# Altium PCB PCB1.pcbdoc (part 2 of 2)
Units mil, origin at the board's own origin, x right, y up, seen from the top; angles counter-clockwise.
Board outline 5555 x 3675 mil, 2 copper layers (Top Layer, Bottom Layer); 152 components, 190 nets, 571 pads, 310 vias.
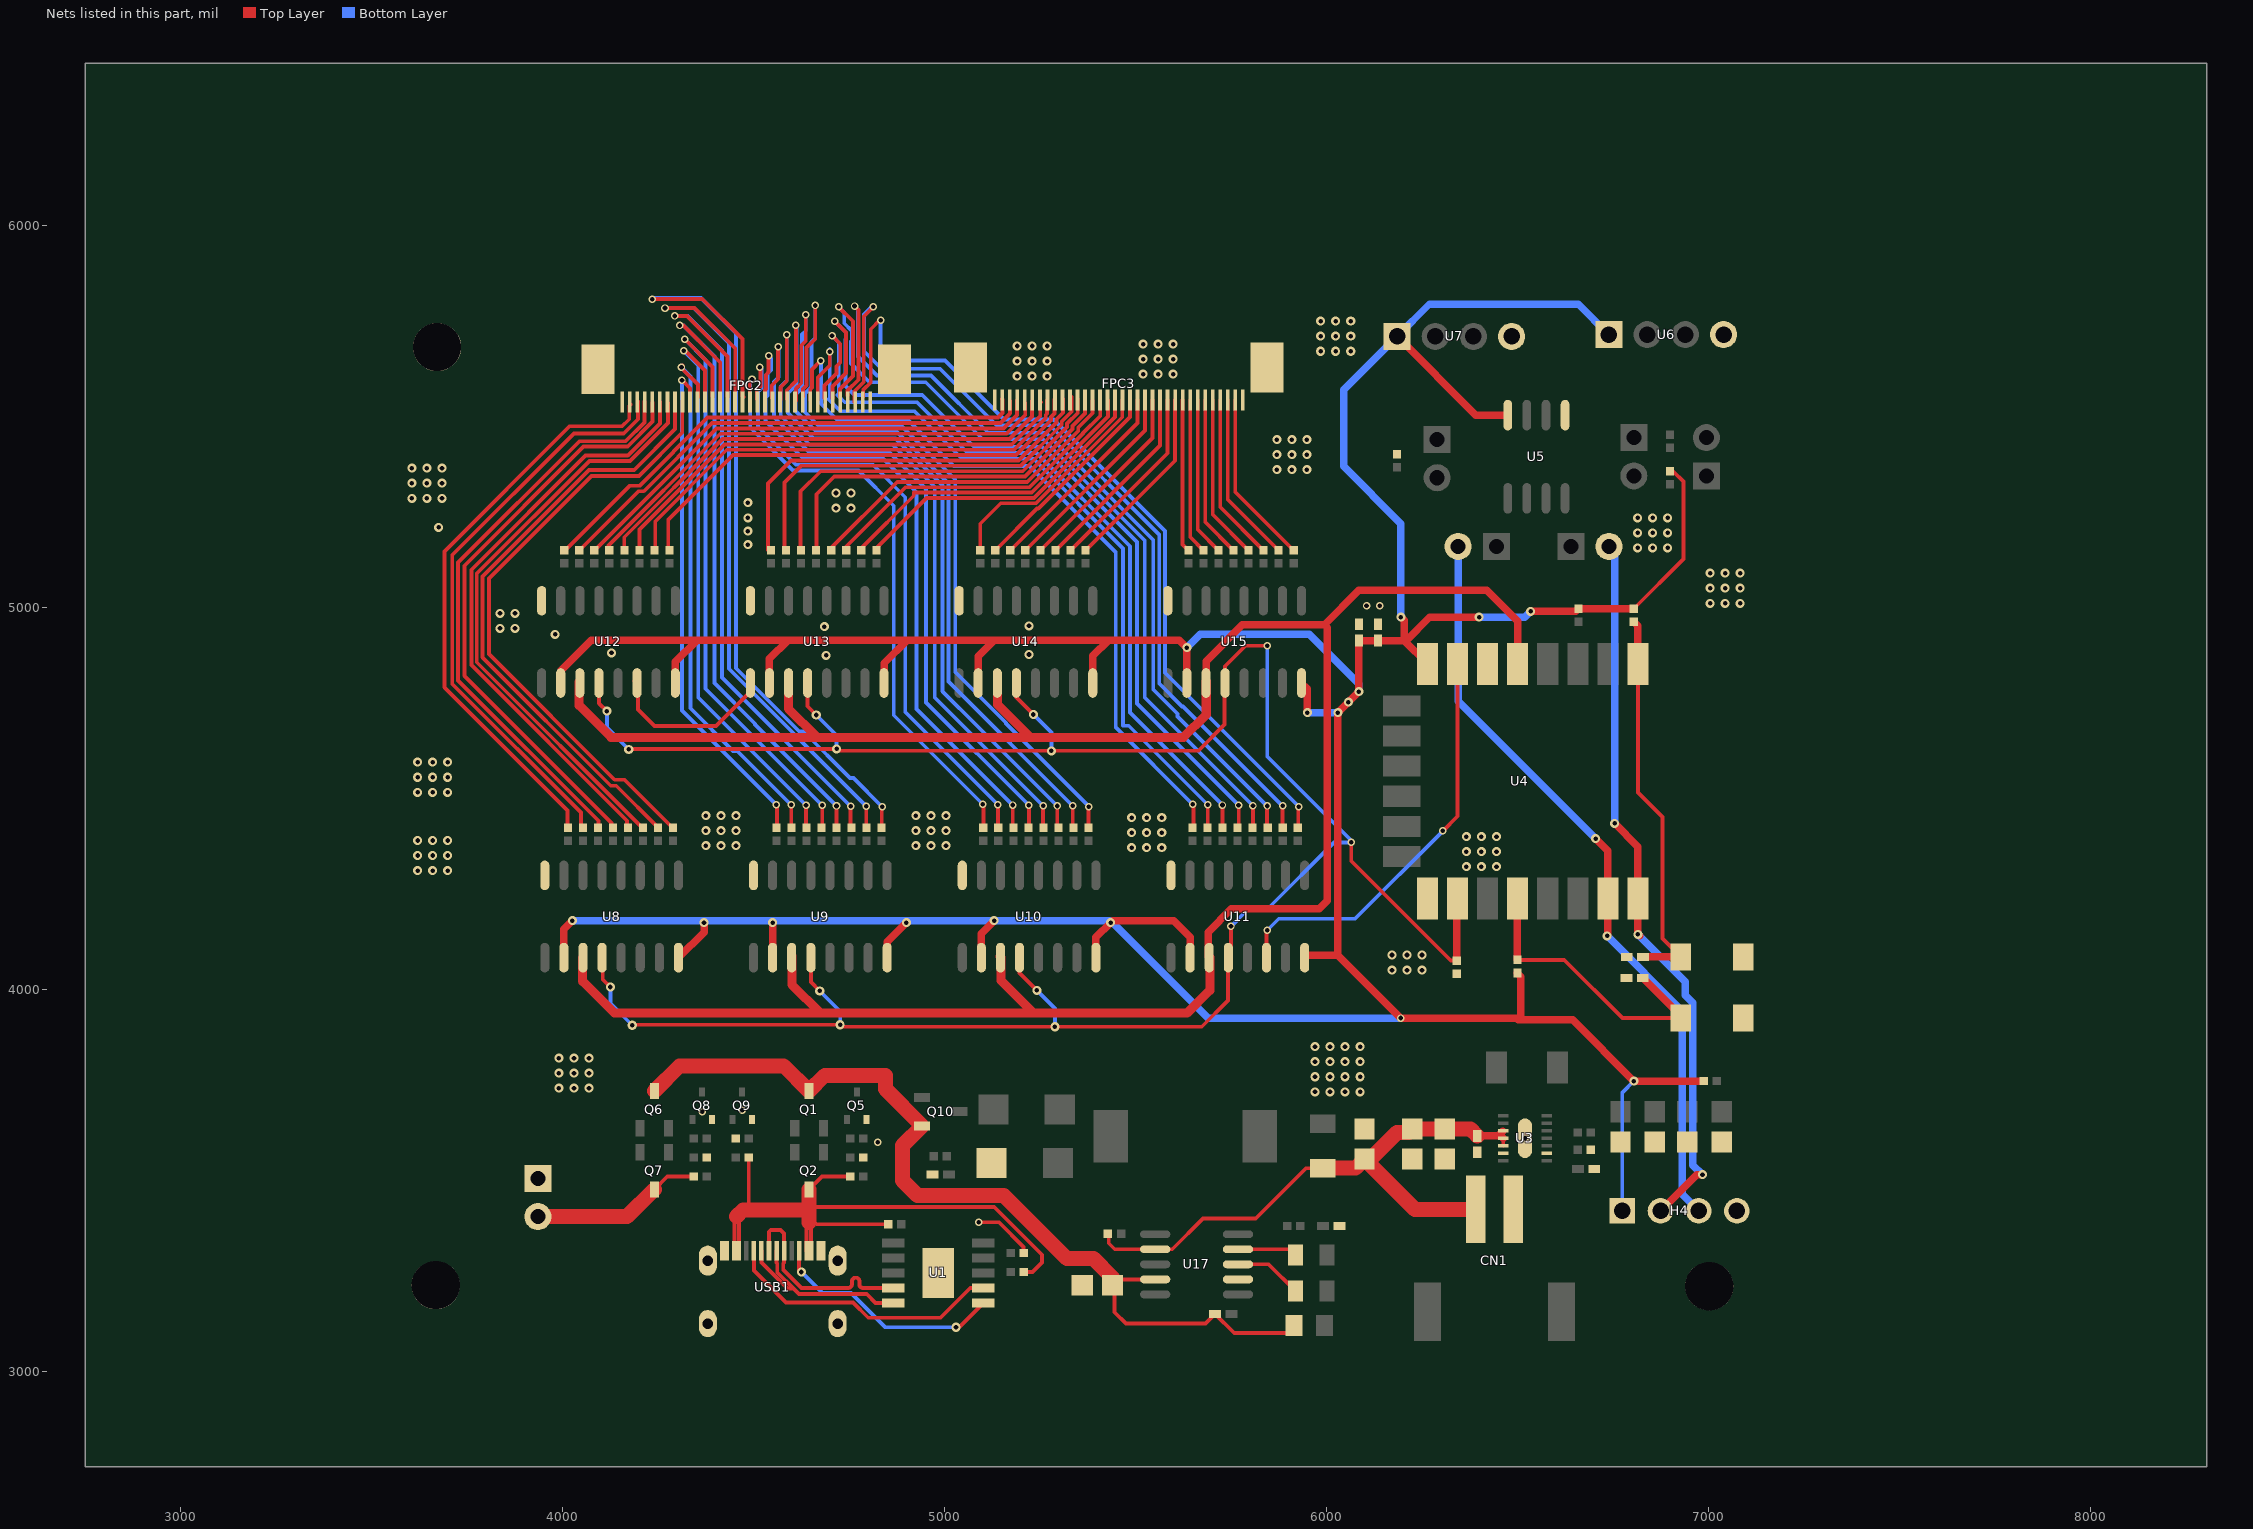
[diagram p2: the nets of this part, all layers, seen from the top]

## Via types
v1: diameter 23.62, hole 12.01, Top Layer to Bottom Layer, 204 vias
v2: diameter 19.68, hole 12.01, Top Layer to Bottom Layer, 69 vias
v3: diameter 24.02, hole 12.01, Top Layer to Bottom Layer, 37 vias

## Nets (pads, with @x,y where several pads share a name; then routed paths per layer and width w, separated by ;. In a path a pad name is that pad's centre, name@x,y a point inside that pad or via, vN(x,y) a via of type N, cw(c..) or ccw(c..) an arc to the next point about the centre after c; other vN are vias at no path point) (continued)
$5N19681: U12.14 U13.9 | length 417.6
  Top Layer w10: U12.14@4187.13,4807.76 U12.14@4188.82,4806.06 ; U12.14@4197.11,4800.53 4197.11,4733.25 4240.27,4690.09 4401.48,4690.09 U13.9@4490.34,4778.95
CC1: U1.7 USB1.A5 | length 735.6
  Top Layer w10: USB1.A5@4500.79,3315.08 4500.79,3264.21 4585,3180 4760,3180 4800,3140 4989.26,3140 5067.25,3217.99 U1.7@5101.78,3217.99
CC2: U1.6 USB1.B5 | length 620.8
  Top Layer w10: USB1.B5@4618.9,3315.08 4618.9,3266.1 v3(4625,3260) ; v3(5030,3115) 5038.15,3115 U1.6@5101.77,3178.62
  Bottom Layer w10: v3(4625,3260) 4680,3205 4755,3205 4845,3115 v3(5030,3115)
CHRG#: LED1.2 U17.3 | length 179.1
  Top Layer w10: U17.3@5768.53,3280 5848.65,3280 LED1.2@5918.65,3210
D+: U1.4 USB1.A6 USB1.B6 | length 535.9
  Top Layer w10: USB1.A6@4540.16,3315.08 4540.16,3365.16 4545,3370 4570,3370 4579.53,3360.47 USB1.B6@4579.53,3315.08 4579.53,3284.49 4577.69,3282.64 4577.69,3265.31 4625,3217.99 4747.42,3217.99 ccw(c4747.42,3227.84) 4757.27,3227.84 4757.27,3235.16 cw(c4767.11,3235.16) 4776.95,3235.16 4776.95,3227.84 ccw(c4786.79,3227.84) 4786.79,3217.99 U1.4@4865.55,3217.99
D-: U1.5 USB1.A7 USB1.B7 | length 536.6
  Top Layer w10: USB1.B7@4520.47,3315.08 4520.47,3284.49 4588.65,3216.31 4604.05,3216.31 ; USB1.A7@4559.84,3315.08 4559.84,3284.49 4561.69,3282.64 4561.69,3258.68 4604.05,3216.31 ; U1.5@4865.55,3178.62 4819.4,3178.62 4796.03,3201.99 4618.37,3201.99 4604.05,3216.31
DONE#: LED2.2 U17.4 | length 156.1
  Top Layer w10: U17.4@5768.53,3319.37 5904.28,3319.37 LED2.2@5918.65,3305
ESP_RXD: H2.2 H4.3 U4.21 | length 2002.7
  Top Layer w19.68: v1(6705,4395) 6737.15,4362.85 U4.21@6737.15,4238.15 6737.15,4142.15 v1(6735,4140)
  Bottom Layer w19.68: H2.2@6345,5160 6345,4755 v1(6705,4395) ; v1(6735,4140) 6931.69,3943.31 6931.69,3463.31 H4.3@6975,3420
ESP_TXD: H3.2 H4.2 U4.22 | length 1901.6
  Top Layer w19.68: v1(6755,4435) 6815.89,4374.11 U4.22@6815.89,4238.15 v1(6815.89,4144.11) v1@6820,4140 ; H4.2@6875,3420 6970,3515 v1(6985,3515)
  Bottom Layer w19.68: H3.2@6740,5160 6755,5145 v1(6755,4435) ; v1(6815.89,4144.11) 6940,4020 6940,3985 6960,3965 6960,3540 v1(6985,3515)
GND: C1.1 C2.2 C3.1 C4.1 C6.2 C7.1 C8.1 C9.1 C10.1 C11.1 C12.1 C13.1 C15.1 C16.1 C17.1 C18.2 CN1.1 D2.2 FPC2.1 FPC2.34 FPC2.35 FPC2.36 FPC3.1 FPC3.34 FPC3.35 FPC3.36 H4.4 H7.1 Q5.2 Q8.2 Q9.2 R1.1 R6.1 R9.1 R11.1 R21.1 R23.2 R31.2 SW1.2 SW2.2 TP1.1 TP2.1 TP4.1 U1.11 U3.2 U3.13 U3.15 U4.15 U5.5 U6.4 U7.4 U8.8 U9.8 U10.8 U11.8 U12.8 U13.8 U14.8 U15.8 U17.2 USB1.1 USB1.2 USB1.3 USB1.4 USB1.A1 USB1.A12 USB1.B1 USB1.B12 | length 154.3
  Top Layer w10: v2@5095,3390 5142.67,3390 5207.04,3325.63 R1.1@5207.04,3310
  other v1: 5970,3731.89 6009.37,3731.89 6048.74,3731.89 6088.11,3731.89 3990,3741.26 4029.37,3741.26 4068.74,3741.26 5970,3771.26 6009.37,3771.26 6048.74,3771.26 6088.11,3771.26 3990,3780.63 4029.37,3780.63 4068.74,3780.63 5970,3810.63 6009.37,3810.63 6048.74,3810.63 6088.11,3810.63 3990,3820 4029.37,3820 4068.74,3820 5970,3850 6009.37,3850 6048.74,3850 6088.11,3850 6171.65,4050.63 6211.02,4050.63 6250.39,4050.63 6171.65,4090 6211.02,4090 6250.39,4090 3620,4311.26 3659.37,4311.26 3698.74,4311.26 6366.65,4321.26 6406.02,4321.26 6445.39,4321.26 3620,4350.63 3659.37,4350.63 3698.74,4350.63 6366.65,4360.63 6406.02,4360.63 6445.39,4360.63 5490,4371.26 5529.37,4371.26 5568.74,4371.26 4375,4376.26 4414.37,4376.26 4453.74,4376.26 4925,4376.26 4964.37,4376.26 5003.74,4376.26 3620,4390 3659.37,4390 3698.74,4390 6366.65,4400 6406.02,4400 6445.39,4400 5490,4410.63 5529.37,4410.63 5568.74,4410.63 4375,4415.63 4414.37,4415.63 4453.74,4415.63 4925,4415.63 4964.37,4415.63 5003.74,4415.63 5490,4450 5529.37,4450 5568.74,4450 4375,4455 4414.37,4455 4453.74,4455 4925,4455 4964.37,4455 5003.74,4455 3620,4516.26 3659.37,4516.26 3698.74,4516.26 3620,4555.63 3659.37,4555.63 3698.74,4555.63 3620,4595 3659.37,4595 3698.74,4595 4690,4875 5221.02,4877.15 4127.69,4881.44 3980,4930 3835.63,4945.63 3875,4945.63 4685,4950 5221.02,4952.15 3835.63,4985 3875,4985 7005,5011.26 7044.37,5011.26 7083.74,5011.26 7005,5050.63 7044.37,5050.63 7083.74,5050.63 7005,5090 7044.37,5090 7083.74,5090 6815,5156.26 6854.37,5156.26 6893.74,5156.26 4485,5165 6815,5195.63 6854.37,5195.63 6893.74,5195.63 4485,5200 3675,5210 4485,5235 6815,5235 6854.37,5235 6893.74,5235 4715.63,5260.63 4755,5260.63 4485,5275 3605,5286.26 3644.37,5286.26 3683.74,5286.26 4715.63,5300 4755,5300 3605,5325.63 3644.37,5325.63 3683.74,5325.63 5870,5361.26 5909.37,5361.26 5948.74,5361.26 3605,5365 3644.37,5365 3683.74,5365 5870,5400.63 5909.37,5400.63 5948.74,5400.63 5870,5440 5909.37,5440 5948.74,5440 5190,5606.26 5229.37,5606.26 5268.74,5606.26 5520,5611.26 5559.37,5611.26 5598.74,5611.26 5190,5645.63 5229.37,5645.63 5268.74,5645.63 5520,5650.63 5559.37,5650.63 5598.74,5650.63 5985,5671.26 6024.37,5671.26 6063.74,5671.26 5190,5685 5229.37,5685 5268.74,5685 5520,5690 5559.37,5690 5598.74,5690 5985,5710.63 6024.37,5710.63 6063.74,5710.63 5985,5750 6024.37,5750 6063.74,5750
  other v2: 5090,3390 4825,3600 4365,3680 4470,3683.33 6105,5005 6140,5005
  other v3: 6520,3610
GPIO0: C2.1 R24.1 SW2.1 U4.18 | length 798.8
  Top Layer w10: R24.1@6500,4077.04 6622.96,4077.04 6775,3925 SW2.1@6928.11,3925
  Top Layer w19.68: R24.1@6500,4077.04 6500,4237.23 U4.18@6500.92,4238.15 ; C2.1@6828.54,4030 6928.11,3930.43 SW2.1@6928.11,3925
HSPI_CLK: U4.5 U8.11 U9.11 U10.11 U11.11 U12.11 U13.11 U14.11 U15.11 | length 6663
  Top Layer w19.68: U15.11@5684.72,4802.46 5685,4802.74 5685,4860 5780,4955 5995,4955 ; U11.11@5692.99,4083.15 5690,4086.14 5690,4150 5750.69,4210.69 5980.69,4210.69 6002.35,4232.35 6002.35,4947.65 5995,4955 ; U4.5@6500.93,4852.32 6500.93,4964.07 6420,5045 6085,5045 5995,4955
  Top Layer w23.62: U12.11@4042.7,4804.94 4042.7,4744.01 4126.48,4660.23 4665.97,4660.23 ; U8.11@4051.96,4082.31 4051.96,4021.38 4135.74,3937.6 4675.23,3937.6 ; U13.11@4591.08,4810.02 4591.08,4735.12 4665.97,4660.23 ; U9.11@4600.34,4087.39 4600.34,4012.49 4675.23,3937.6 ; U14.11@5138.19,4806.21 5138.19,4746.55 5224.51,4660.23 ; U10.11@5144.91,4086.12 5147.45,4083.58 5147.45,4023.92 5233.77,3937.6 ; U15.11@5685.3,4806.21 5685.3,4719.89 5625.63,4660.23 5224.51,4660.23 ; U11.11@5694.56,4083.58 5694.56,3997.26 5634.9,3937.6 5233.77,3937.6 ; 4665.97,4660.23 5224.51,4660.23 ; 4675.23,3937.6 5233.77,3937.6
HSPI_CS: R23.1 U4.16 U8.12 U9.12 U10.12 U11.12 U12.12 U13.12 U14.12 U15.12 | length 6543.2
  Top Layer w10: U12.12@4095.27,4806.32 4095.27,4749.19 v3(4115.58,4728.88) ; U8.12@4104.53,4083.68 4104.53,4026.56 v3(4124.84,4006.25) ; v3(4172.7,4628.6) 4173.97,4629.87 v3(4717.27,4629.87) 4722.35,4624.79 v3(5279.62,4624.79) 5664.25,4624.79 5732.79,4693.34 U15.12@5732.79,4803.78 ; v3(4181.96,3905.97) 4183.23,3907.24 v3(4726.54,3907.24) 4731.61,3902.16 v3(5288.88,3902.16) 5673.51,3902.16 5742.05,3970.71 U11.12@5742.05,4081.14 ; U13.12@4641.11,4802.51 4641.11,4741.58 v3(4663.96,4718.73) ; U9.12@4650.37,4079.87 4650.37,4018.94 v3(4673.22,3996.09) ; U14.12@5186.95,4807.59 5186.95,4765.7 v3(5232.65,4720) ; U10.12@5196.21,4084.95 5196.21,4043.06 v3(5241.91,3997.36) ; U15.12@5734.72,4802.46 5734.72,4846.26 5788.46,4900 v2(5845,4900) ; U11.12@5742.99,4083.15 5750,4090.16 v2(5750,4165) ; v2(6065,4385) 6065,4336.41 6325.81,4075.6 R23.1@6341.44,4075.6
  Top Layer w19.68: R23.1@6341.44,4075.6 6341.44,4236.14 U4.16@6343.44,4238.15
  Bottom Layer w10: v3(4115.58,4728.88) 4115.58,4685.72 v3(4172.7,4628.6) ; v3(4124.84,4006.25) 4124.84,3963.09 v3(4181.96,3905.97) ; v3(4663.96,4718.73) 4717.27,4665.41 v3(4717.27,4629.87) ; v3(4673.22,3996.09) 4726.54,3942.78 v3(4726.54,3907.24) ; v3(5232.65,4720) 5279.62,4673.03 v3(5279.62,4624.79) ; v3(5241.91,3997.36) 5288.88,3950.4 v3(5288.88,3902.16) ; v2(5750,4165) 5795,4210 5845,4210 6020,4385 v2(6065,4385) 6065,4390 5845,4610 v2(5845,4900)
HSPI_MISO: U4.6
HSPI_MOSI: U4.7 U11.14 | length 1093.6
  Top Layer w10: U11.14@5842.99,4083.15 5842.99,4152.99 v2(5845,4155) ; v2(6305,4415) 6343.44,4453.44 U4.7@6343.44,4852.32
  Bottom Layer w10: v2(5845,4155) 5875,4185 6075,4185 v2(6305,4415)
LI-CELL+: C4.2 C7.2 C8.2 C9.2 CN1.2 R14.2 R15.2 U3.10 U3.11 U3.12 U17.7 | length 1598.1
  Top Layer w10: R15.2@5427.96,3360 5430,3357.96 5430,3335 5445.63,3319.37 U17.7@5551.47,3319.37 5596.11,3319.37 5676.74,3400 5815,3400 5946.78,3531.78 R14.2@5990,3531.78 ; U3.12@6462.91,3590.32 U3.11@6462.91,3610
  Top Layer w19.68: C9.2@6395,3616.46 6449.68,3616.46 ; U3.10@6461.84,3628.62 6449.68,3616.46 ; U3.11@6462.91,3610 6456.45,3616.46 6449.68,3616.46
  Top Layer w39.37: R14.2@5990,3531.78 6076.15,3531.78 C4.2@6100,3555.63 ; C7.2@6215,3634.37 C7.2@6225,3634.37 ; CN1.2@6390.79,3423.86 6231.77,3423.86 C4.2@6100,3555.63 ; C9.2@6395,3616.46 6377.09,3634.37 C8.2@6310,3634.37 C7.2@6225,3634.37 ; C4.2@6100,3555.63 6115.63,3555.63 6185,3625 6215.63,3625 C7.2@6225,3634.37
OUT1: FPC2.2 R33.2 | length 1518.9
  Top Layer w10: R33.2@4012.29,4428.94 4012.29,4468.83 3690.02,4791.1 3690.02,5146.65 4018.09,5474.72 4155.44,5474.72 4174.09,5493.37 4174.09,5527.56 FPC2.2@4178.23,5531.7
OUT2: FPC2.3 R34.2 | length 1535.3
  Top Layer w10: R34.2@4047.72,4422.4 4047.72,4462.89 3710.42,4800.18 3710.42,5137.46 4029.03,5456.07 4159.58,5456.07 4196.88,5493.37 FPC2.3@4196.88,5539.99
OUT3: FPC2.4 R35.2 | length 1538
  Top Layer w10: R35.2@4093.24,4427.54 4093.24,4441.68 3725.81,4809.11 3725.81,5117.75 4043.66,5435.6 4164.37,5435.6 4213.85,5485.08 FPC2.4@4213.85,5540.51
OUT4: FPC2.5 R36.2 | length 1546.9
  Top Layer w10: R36.2@4127.65,4421.94 4127.65,4436.08 3742.52,4821.21 3742.52,5109.37 4054.74,5421.59 4170.18,5421.59 4235.46,5486.87 FPC2.5@4235.46,5537.55
OUT5: FPC2.6 R37.2 | length 1555.3
  Top Layer w10: R37.2@4168.31,4421.68 4168.31,4441.69 3760.78,4849.22 3760.78,5099.07 4059.58,5397.86 4170.44,5397.86 4254.37,5481.79 FPC2.6@4254.37,5538.78
OUT6: FPC2.7 R38.2 | length 1563.3
  Top Layer w10: R38.2@4209.24,4422.43 3774.8,4856.88 3774.8,5088.97 4069.68,5383.85 4176.25,5383.85 4275.36,5482.96 FPC2.7@4275.36,5536.05
OUT7: FPC2.8 R39.2 | length 1589.5
  Top Layer w10: R39.2@4249.87,4422.05 4249.87,4423.7 4140.01,4533.55 4125.87,4533.55 3789.74,4869.69 3789.74,5081.14 4068.97,5360.38 4187.09,5360.38 4294.33,5467.62 FPC2.8@4294.33,5534.45
OUT8: FPC2.9 R40.2 | length 1613.5
  Top Layer w10: R40.2@4286.77,4423.64 4161.34,4549.08 4135.99,4549.08 3806.5,4878.57 3806.5,5075.95 4075.38,5344.82 4199.71,5344.82 4313.17,5458.28 FPC2.9@4313.17,5540.65
OUT9: FPC2.10 R49.2 | length 1336.4
  Top Layer w10: v2(4312.23,5595.76) 4333.47,5574.52 FPC2.10@4333.47,5540.84 ; v2(4558.93,4484.12) 4561,4482.05 R49.2@4561,4426.1
  Bottom Layer w10: v2(4312.23,5595.76) 4312.23,4730.82 v2(4558.93,4484.12)
OUT10: FPC2.11 R50.2 | length 1431.4
  Top Layer w10: v2@4313.78,5634.61 4313.78,5624.25 4354.19,5583.84 FPC2.11@4354.19,5550.69 ; R50.2@4598.38,4423.65 v2(4598.38,4483.06)
  Bottom Layer w10: v2(4310.9,5628.97) 4334.44,5605.43 4334.44,4736.22 4446.08,4624.58 4456.86,4624.58 v2(4598.38,4483.06)
OUT11: FPC2.12 R51.2 | length 1541.6
  Top Layer w10: v2@4315.1,5671.71 4321.35,5671.71 4372.38,5620.68 FPC2.12@4372.38,5537.79 ; R51.2@4637.09,4424.87 v2(4637.09,4482.2)
  Bottom Layer w10: v2(4316.48,5672.4) 4354.78,5634.11 4354.78,4764.51 v2(4637.09,4482.2)
OUT12: FPC2.13 R52.2 | length 1606.4
  Top Layer w10: v2(4319.88,5702.88) 4392.41,5630.35 FPC2.13@4392.41,5552.99 ; v2(4679.1,4482.11) 4679.79,4481.42 R52.2@4679.79,4425.47
  Bottom Layer w10: v2(4319.88,5702.88) 4374.01,5648.75 4374.01,4787.2 v2(4679.1,4482.11)
OUT13: FPC2.14 R53.2 | length 1732
  Top Layer w10: v2(4306.24,5738.8) 4315.91,5738.8 4412.27,5642.44 FPC2.14@4412.27,5547.81 ; R53.2@4716.96,4423.42 v2(4716.96,4480.4)
  Bottom Layer w10: v2(4306.24,5738.8) 4316.33,5738.8 4397.06,5658.07 4397.06,4802.06 4503.27,4695.86 4503.27,4694.09 v2(4716.96,4480.4)
OUT14: FPC2.15 R54.2 | length 1837.9
  Top Layer w10: v2(4293.29,5763.67) 4325.36,5763.67 4431.44,5657.58 FPC2.15@4431.44,5551.95 ; R54.2@4753.85,4423.99 v2(4753.85,4479.71)
  Bottom Layer w10: v2(4293.29,5763.67) 4326.89,5763.67 4416.84,5673.72 4416.84,4816.73 v2(4753.85,4479.71)
OUT15: FPC2.16 R55.2 | length 1979.4
  Top Layer w10: v2(4267.79,5784.47) 4345.47,5784.47 4451.87,5678.08 FPC2.16@4451.87,5548.07 ; R55.2@4794.65,4425.67 v2(4794.65,4480.01)
  Bottom Layer w10: v2(4267.79,5784.47) 4267.89,5784.58 4343.01,5784.58 4435.1,5692.5 4435.1,4839.57 v2(4794.65,4480.01)
OUT16: FPC2.17 R56.2 | length 2155
  Top Layer w10: v2(4234.85,5807.49) 4235.88,5808.52 4365.4,5808.52 4470.39,5703.53 4470.39,5554.33 FPC2.17@4473.15,5551.56 ; R56.2@4835.67,4426.29 4835.67,4477.06 v2(4836.71,4478.09)
  Bottom Layer w10: v2(4234.85,5807.49) 4238.49,5811.13 4362.38,5811.13 4454.07,5719.44 4454.07,4840.94 4618.81,4676.19 4629.69,4676.19 4752.47,4553.41 4761.39,4553.41 v2(4836.71,4478.09)
OUT17: FPC2.18 R57.2 | length 1577.2
  Top Layer w10: FPC2.18@4489.66,5550.79 4489.66,5592.46 v2(4495.65,5598.45) ; v2(5100.13,4484.81) 5102.2,4482.74 R57.2@5102.2,4426.79
  Bottom Layer w10: v2(4495.65,5598.45) 4491.18,5593.98 4491.18,5470.94 4603.08,5359.04 4774.56,5359.04 4867,5266.59 4867,4717.94 v2(5100.13,4484.81)
OUT18: FPC2.19 R58.2 | length 1678.4
  Top Layer w10: FPC2.19@4508.08,5545.61 4508.08,5568.24 4518,5578.16 4518,5627.9 v2(4516.37,5629.53) ; R58.2@5139.58,4424.35 v2(5139.58,4483.75)
  Bottom Layer w10: v2(4516.37,5629.53) 4521.12,5624.78 4521.12,5575.11 4511.12,5565.11 4511.12,5473.47 4610.59,5374 4812.12,5374 4897.13,5288.99 4897.13,4726.2 v2(5139.58,4483.75)
OUT19: FPC2.20 R59.2 | length 1747.7
  Top Layer w10: FPC2.20@4529.84,5548.71 4529.84,5570.66 4532.02,5572.36 4532.02,5609.85 4539.16,5616.99 v2(4539.16,5659.58) ; R59.2@5178.29,4425.56 v2(5178.29,4482.89)
  Bottom Layer w10: v2(4539.16,5659.58) 4545.82,5652.93 4545.82,5621.55 4536.49,5612.23 4536.49,5555.24 4531.31,5550.06 4531.31,5488.93 4628.71,5391.53 4836.97,5391.53 4926.51,5301.99 4926.51,4734.67 v2(5178.29,4482.89)
OUT20: FPC2.21 R60.2 | length 1804.4
  Top Layer w10: FPC2.21@4547.45,5548.71 4547.45,5581.27 4564.03,5597.85 v2(4564.03,5683.41) ; v2(5220.3,4482.81) 5220.99,4482.11 R60.2@5220.99,4426.16
  Bottom Layer w10: v2(4564.03,5683.41) 4565.5,5681.94 4565.5,5603.85 4553.07,5591.42 4553.07,5498.51 4645.8,5405.78 4856.13,5405.78 4951.46,5310.46 4951.46,4751.64 v2(5220.3,4482.81)
OUT21: FPC2.22 R61.2 | length 1885.3
  Top Layer w10: FPC2.22@4570.25,5544.57 4570.25,5577.13 4586.82,5593.71 v2(4586.82,5714.49) ; R61.2@5258.16,4424.11 v2(5258.16,4481.09)
  Bottom Layer w10: v2(4586.82,5714.49) 4586.82,5595.12 4570.93,5579.22 4570.93,5502.55 4647.08,5426.4 4863.63,5426.4 4974.37,5315.66 4974.37,4764.88 v2(5258.16,4481.09)
OUT22: FPC2.23 R62.2 | length 1945.7
  Top Layer w10: FPC2.23@4586.82,5546.64 4586.82,5569.28 4610.66,5593.11 v2(4610.66,5739.36) ; R62.2@5295.06,4424.68 v2(5295.06,4480.4)
  Bottom Layer w10: v2(4610.66,5739.36) 4611.9,5738.12 4611.9,5582.85 4589.1,5560.06 4590.14,5559.02 4590.14,5509.29 4656.71,5442.71 4871.45,5442.71 4994.36,5319.8 4994.36,4780.63 5037.87,4737.12 5038.34,4737.12 v2(5295.06,4480.4)
OUT23: FPC2.24 R63.2 | length 2011.7
  Top Layer w10: FPC2.24@4610.66,5542.5 4610.66,5573.29 4624.67,5587.3 4624.67,5686.52 4636.56,5698.41 v2(4636.56,5767.34) ; R63.2@5335.85,4426.37 v2(5335.85,4480.7)
  Bottom Layer w10: v2(4636.56,5767.34) 4636.56,5725.15 4626.45,5715.04 4626.45,5574.82 4609.87,5558.24 4609.87,5514.73 4665.13,5459.47 4875.81,5459.47 5009.9,5325.37 5009.9,4806.66 v2(5335.85,4480.7)
OUT24: FPC2.25 R64.2 | length 2062.5
  Top Layer w10: FPC2.25@4629.31,5552.86 4629.31,5572.12 4638.69,5581.5 4638.69,5680.71 4661.43,5703.45 v2(4661.43,5791.17) ; R64.2@5376.87,4426.98 5376.87,4477.75 v2(5377.91,4478.78)
  Bottom Layer w10: v2(4661.43,5791.17) 4661.43,5706.33 4651.14,5696.05 4651.14,5577.24 4634.56,5560.66 4634.56,5511.62 4667.72,5478.46 4884.96,5478.46 5027.94,5335.48 5027.94,4830.89 5160.57,4698.26 5160.57,4696.12 v2(5377.91,4478.78)
OUT25: FPC2.26 R65.2 | length 1964.8
  Top Layer w10: FPC2.26@4647.98,5541.45 4647.98,5570.97 4652.7,5575.69 4652.7,5623.65 4675.27,5646.21 v2(4675.27,5646.44) ; v2(5649.62,4484.81) 5651.69,4482.74 R65.2@5651.69,4426.79
  Bottom Layer w10: v2(4675.27,5646.44) 4676.07,5645.64 4676.07,5533.95 4716.48,5493.54 4901.43,5493.54 5024.21,5370.76 5222.36,5370.76 5448.5,5144.63 5448.5,4685.93 v2(5649.62,4484.81)
OUT26: FPC2.27 R66.2 | length 2038.3
  Top Layer w10: FPC2.27@4668.01,5542.83 4668.01,5602.92 4699.1,5634.01 v2(4699.1,5670.27) ; R66.2@5689.07,4424.35 v2(5689.07,4483.75)
  Bottom Layer w10: v2@4699.1,5677.53 v2(4699.1,5670.27) 4699.1,5549.08 4695.76,5545.74 4727.36,5514.14 4921.63,5514.14 5045.96,5389.8 5232.47,5389.8 5467.15,5155.12 5467.15,4690.42 5482.4,4690.42 v2(5689.07,4483.75)
OUT27: FPC2.28 R67.2 | length 2118.5
  Top Layer w10: FPC2.28@4685.86,5549.16 4685.86,5581.72 4716.94,5612.8 4716.94,5632.05 4726.94,5642.05 4726.94,5690.44 v2(4705.2,5712.18) ; R67.2@5727.78,4425.56 v2(5727.78,4482.89)
  Bottom Layer w10: v2(4705.2,5712.18) 4722.95,5694.42 4722.95,5559.55 4719.85,5556.45 4738.5,5537.8 4928.11,5537.8 5060.73,5405.17 5241.01,5405.17 5485.54,5160.65 5485.54,4725.13 v2(5727.78,4482.89)
OUT28: FPC2.29 R68.2 | length 2199.7
  Top Layer w10: FPC2.29@4706.58,5547.78 4706.58,5578.86 4742.14,5614.42 4742.14,5720.14 v2(4712.8,5749.48) ; v2(5769.79,4482.81) 5770.48,4482.11 R68.2@5770.48,4426.16
  Bottom Layer w10: v2(4712.8,5749.48) 4742.64,5719.63 4742.64,5704.96 4740.57,5702.88 4740.57,5580.62 4764.4,5556.79 4941.58,5556.79 5077.31,5421.06 5255.17,5421.06 5504.19,5172.04 5504.19,4748.4 v2(5769.79,4482.81)
OUT29: FPC2.30 R69.2 | length 2259.2
  Top Layer w10: v2(4722.47,5787.47) 4760.1,5749.84 4760.1,5606.82 4725.92,5572.65 FPC2.30@4725.92,5551.92 ; R69.2@5807.65,4424.11 v2(5807.65,4481.09)
  Bottom Layer w10: v2(4722.47,5787.47) 4737.31,5772.63 4737.31,5744.79 4756.66,5725.44 4756.66,5699.15 4754.58,5697.08 4754.58,5638.75 4803.12,5590.21 4950.77,5590.21 5099.97,5441 5258.5,5441 5524.26,5175.24 5524.26,4764.48 v2(5807.65,4481.09)
OUT30: FPC2.31 R70.2 | length 2234.5
  Top Layer w10: FPC2.31@4745.72,5554.86 4745.72,5568.21 4774.14,5596.63 4774.14,5779.71 v2(4764.14,5789.71) ; R70.2@5844.55,4424.68 v2(5844.55,4480.4)
  Bottom Layer w10: v2(4764.14,5789.71) 4773.66,5780.2 4773.66,5657.62 4823.39,5607.88 4964.31,5607.88 5114.54,5457.65 5265.82,5457.65 5546.61,5176.86 5546.61,4785.72 5610.33,4722 5610.33,4714.62 v2(5844.55,4480.4)
OUT31: FPC2.32 R71.2 | length 2271.9
  Top Layer w10: FPC2.32@4763.74,5537.94 4763.74,5566.41 4788.16,5590.83 4788.16,5762.33 v2(4813.47,5787.64) ; R71.2@5885.34,4426.37 v2(5885.34,4480.7)
  Bottom Layer w10: v2(4813.47,5787.64) 4809.04,5787.64 4788.94,5767.54 4788.94,5671.19 4834.53,5625.6 4987.88,5625.6 5136.04,5477.43 5275.4,5477.43 5562.41,5190.43 5562.41,4800.33 5621.47,4741.27 5624.78,4741.27 v2(5885.34,4480.7)
OUT32: FPC2.33 R72.2 | length 2161.3
  Top Layer w10: FPC2.33@4786.79,5552.53 4786.79,5569.41 4806.56,5589.18 4806.56,5728.94 4830.39,5752.77 v2(4832.46,5752.77) ; R72.2@5926.36,4426.98 5926.36,4477.75 v2(5927.4,4478.78)
  Bottom Layer w10: v2(4832.46,5752.77) 4832.46,5669.89 4855.38,5646.97 5001.48,5646.97 5155.86,5492.58 5284.86,5492.58 5577.04,5200.4 5577.04,4829.14 v2(5927.4,4478.78)
OUT33: FPC3.2 R73.2 | length 1327.7
  Top Layer w10: R73.2@4008.7,5152.51 4174.99,5318.81 4200.75,5318.81 4379.48,5497.54 5139.65,5497.54 5151.39,5509.28 5151.39,5545.2 FPC3.2@5150.47,5546.12
OUT34: FPC3.3 R74.2 | length 1304.9
  Top Layer w10: R74.2@4047.4,5152.25 4047.4,5153.96 4198.23,5304.79 4212.38,5304.79 4391.11,5483.52 5146.44,5483.52 5171.59,5508.68 FPC3.3@5171.59,5540.8
OUT35: FPC3.4 R75.2 | length 1286.6
  Top Layer w10: R75.2@4086.78,5153.8 4402.27,5469.3 5154.67,5469.3 5189.38,5504.01 5189.38,5542 FPC3.4@5190.07,5542.7
OUT36: FPC3.5 R76.2 | length 1281.7
  Top Layer w10: R76.2@4119.5,5145.86 4119.5,5162.44 4412.35,5455.29 5162.26,5455.29 5211.23,5504.26 FPC3.5@5211.23,5536.03
OUT37: FPC3.6 R77.2 | length 1268.7
  Top Layer w10: R77.2@4161.06,5156.81 4161.06,5184.18 4418.15,5441.27 5170.06,5441.27 5228.78,5500 5228.78,5541.44 FPC3.6@5229.7,5542.36
OUT38: FPC3.7 R78.2 | length 1254.8
  Top Layer w10: R78.2@4200.84,5158.91 4200.84,5204.13 4423.96,5427.26 5175.86,5427.26 5250.77,5502.17 5250.77,5536.41 FPC3.7@5252.15,5537.79
OUT39: FPC3.8 R79.2 | length 1253.6
  Top Layer w10: R79.2@4242.19,5154.25 4242.19,5225.74 4429.71,5413.26 5181.68,5413.26 5264.79,5496.36 5264.79,5504.98 5268.47,5508.66 FPC3.8@5268.47,5542.28
OUT40: FPC3.9 R80.2 | length 1244.7
  Top Layer w10: R80.2@4276.52,5154.12 4276.52,5230.28 4445.48,5399.24 5187.49,5399.24 5278.8,5490.56 5278.8,5499.17 5288.01,5508.38 FPC3.9@5288.01,5545.16
OUT41: FPC3.10 R81.2 | length 1065.1
  Top Layer w10: R81.2@4537.4,5150.71 4537.4,5324.78 4597.85,5385.23 5193.29,5385.23 5292.82,5484.75 5292.82,5493.37 5309.83,5510.38 FPC3.10@5309.83,5547.03
OUT42: FPC3.11 R82.2 | length 1049.3
  Top Layer w10: R82.2@4580.92,5150.71 4580.92,5327.89 4624.24,5371.21 5199.1,5371.21 5306.83,5478.94 5306.83,5487.56 5332.07,5512.8 FPC3.11@5332.07,5552.17
OUT43: FPC3.12 R83.2 | length 1005.3
  Top Layer w10: R83.2@4619.77,5153.82 4622.88,5156.93 4622.88,5304.57 4675.5,5357.19 5204.9,5357.19 5320.85,5473.14 5320.85,5481.76 5348.68,5509.59 FPC3.12@5348.68,5547.03
OUT44: FPC3.13 R84.2 | length 979.9
  Top Layer w10: R84.2@4664.84,5147.6 4664.84,5296.8 4711.22,5343.18 5210.71,5343.18 5334.87,5467.33 5334.87,5475.95 5367.33,5508.42 FPC3.13@5367.33,5543.92
OUT45: FPC3.14 R85.2 | length 877
  Top Layer w10: R85.2@4697.48,5150.71 4875.93,5329.16 5216.52,5329.16 5350.17,5462.82 5350.17,5471.44 5387.54,5508.8 FPC3.14@5387.54,5542.36
OUT46: FPC3.15 R86.2 | length 852.1
  Top Layer w10: R86.2@4737.89,5155.37 4897.66,5315.15 5222.32,5315.15 5362.9,5455.72 5362.9,5456.98 5407.57,5501.65 FPC3.15@5407.57,5539.95
OUT47: FPC3.16 R87.2 | length 834.6
  Top Layer w10: R87.2@4782.62,5155.89 4919.39,5292.66 4919.39,5300.43 4920.09,5301.13 5228.13,5301.13 5427.6,5500.61 FPC3.16@5427.6,5542.88
OUT48: FPC3.17 R88.2 | length 805.2
  Top Layer w10: R88.2@4823.03,5157.45 4952.7,5287.12 5233.93,5287.12 5446.25,5499.44 FPC3.17@5446.25,5539.77
OUT49: FPC3.18 R89.2 | length 594.1
  Top Layer w10: R89.2@5093.45,5157.45 5093.45,5219.61 5146.94,5273.1 5239.74,5273.1 5465.25,5498.61 FPC3.18@5465.25,5543.23
OUT50: FPC3.19 R90.2 | length 542
  Top Layer w10: R90.2@5132.63,5149.69 5242.25,5259.31 5245.54,5259.08 5485.71,5499.25 FPC3.19@5485.71,5543.29
OUT51: FPC3.20 R91.2 | length 531.7
  Top Layer w10: R91.2@5172,5149.69 5505.39,5483.08 FPC3.20@5505.39,5543.29
OUT52: FPC3.21 R92.2 | length 523.5
  Top Layer w10: R92.2@5211.37,5149.69 5525.08,5463.4 FPC3.21@5525.08,5543.29
OUT53: FPC3.22 R93.2 | length 515.4
  Top Layer w10: R93.2@5250.74,5149.69 5544.76,5443.71 FPC3.22@5544.76,5543.29
OUT54: FPC3.23 R94.2 | length 507.2
  Top Layer w10: R94.2@5290.11,5149.69 5564.45,5424.03 FPC3.23@5564.45,5543.29
OUT55: FPC3.24 R95.2 | length 499.1
  Top Layer w10: R95.2@5329.48,5149.69 5584.13,5404.34 FPC3.24@5584.13,5543.29
OUT56: FPC3.25 R96.2 | length 490.9
  Top Layer w10: R96.2@5368.85,5149.69 5603.82,5384.66 FPC3.25@5603.82,5543.29
OUT57: FPC3.26 R97.2 | length 399.9
  Top Layer w10: FPC3.26@5623.5,5543.29 5623.5,5164.97 R97.2@5638.78,5149.69
OUT58: FPC3.27 R98.2 | length 408.1
  Top Layer w10: FPC3.27@5643.19,5543.29 5643.19,5184.65 R98.2@5678.15,5149.69
OUT59: FPC3.28 R99.2 | length 416.2
  Top Layer w10: FPC3.28@5662.87,5543.29 5662.87,5204.34 R99.2@5717.52,5149.69
OUT60: FPC3.29 R100.2 | length 424.4
  Top Layer w10: FPC3.29@5682.56,5543.29 5682.56,5224.02 R100.2@5756.89,5149.69
OUT61: FPC3.30 R101.2 | length 432.5
  Top Layer w10: FPC3.30@5702.24,5543.29 5702.24,5243.71 R101.2@5796.26,5149.69
OUT62: FPC3.31 R102.2 | length 440.7
  Top Layer w10: FPC3.31@5721.93,5543.29 5721.93,5263.39 R102.2@5835.63,5149.69
OUT63: FPC3.32 R103.2 | length 448.8
  Top Layer w10: FPC3.32@5741.69,5543.23 5741.69,5283 R103.2@5875,5149.69
OUT64: FPC3.33 R104.2 | length 456.9
  Top Layer w10: FPC3.33@5761.38,5543.23 5761.38,5302.68 R104.2@5914.37,5149.69
RST: C18.1 R25.2 SW1.1 U4.1 | length 1027.7
  Top Layer w10: U4.1@6815.89,4852.32 6815.89,4515.89 6880,4451.79 6880,4133.11 SW1.1@6928.11,4085
  Top Layer w19.68: R25.2@6805,4962.96 6815.89,4952.07 U4.1@6815.89,4852.32 ; C18.1@6829.38,4085 SW1.1@6928.11,4085
SOLAR+: C3.2 C5.2 Q1.3 Q6.3 Q10.2 R32.2 U17.9 | length 2405.9
  Top Layer w10: C3.2@5439.37,3225 C3.2@5445.41,3231.04 ; U17.9@5551.47,3240.63 5455,3240.63 C3.2@5445.41,3231.04 ; R32.2@5915.63,3120 5895.63,3100 5758.54,3100 C5.2@5708.54,3150 5683.54,3125 5475,3125 5445.41,3154.59 C3.2@5445.41,3231.04
  Top Layer w39.37: Q6.3@4240,3733.62 4306.38,3800 4578.62,3800 Q1.3@4645,3733.62 4686.38,3775 4845,3775 4845,3738.97 Q10.2@4941.38,3642.6 4890,3591.22 4890,3499.37 4929.37,3460 5155,3460 5320,3295 5390,3295 5439.37,3245.63 C3.2@5439.37,3225
SOLAR_IN: H7.2 Q7.3 R10.2 | length 451.5
  Top Layer w10: Q7.3@4240,3476.38 4273.62,3510 R10.2@4342.96,3510
  Top Layer w39.37: H7.2@3935,3405 4168.62,3405 Q7.3@4240,3476.38
VBUS: Q2.3 R2.1 R3.2 R5.2 R12.2 USB1.A4 USB1.A9 USB1.B4 USB1.B9 | length 1856.9
  Top Layer w10: USB1.A4@4449.61,3315.08 4449.61,3400.01 ; USB1.B9@4461.42,3315.08 4461.43,3400.01 4484.13,3422.71 4487.04,3425.62 R12.2@4487.04,3560 ; USB1.B4@4638.58,3315.07 4638.58,3400 ; Q2.3@4645,3476.38 4678.62,3510 R5.2@4752.96,3510 ; USB1.A9@4650.4,3315.07 4650.4,3400 4665.4,3385 R3.2@4852.96,3385 ; 4655,3435 4660,3430 5130,3430 5255,3305 5255,3285 5230,3260 R2.1@5207.04,3260
  Top Layer w39.37: 4455,3405 4472.71,3422.71 4484.13,3422.71 4645,3422.71 ; 4645,3390 4645,3422.71 ; Q2.3@4645,3476.38 4645,3422.71
VCC_3V3: C15.2 C16.2 H4.1 R22.2 R24.2 R25.1 R26.1 R30.2 U4.8 U5.8 U6.1 U7.1 U8.10 U8.16 U9.10 U9.16 U10.10 U10.16 U11.10 U11.16 U12.10 U12.16 U13.10 U13.16 U14.10 U14.16 U15.10 U15.16 | length 12113.2
  Top Layer w10: R25.1@6805,4997.04 6935,5127.04 6935,5330 6907.96,5357.04 R30.2@6900,5357.04
  Top Layer w19.68: U12.10@3994.72,4802.46 3994.72,4834.72 4075,4915 4352.18,4915 ; U8.10@4002.99,4083.15 4002.99,4157.99 v1(4025,4180) ; U12.16@4294.72,4802.46 4294.72,4857.54 4352.18,4915 ; U8.16@4302.99,4083.15 4370,4150.16 v1(4370,4175) ; U13.10@4541.39,4802.46 4541.39,4865.89 4590.49,4915 ; U9.10@4549.66,4083.15 v1(4549.66,4175) ; U13.16@4841.39,4802.46 4841.39,4854.02 4902.36,4915 ; U9.16@4849.66,4083.15 4849.66,4124.66 v1(4900,4175) ; U14.10@5088.05,4802.46 5088.05,4872.74 5130.31,4915 ; U10.10@5096.33,4083.15 5096.33,4146.33 v1(5130,4180) ; U14.16@5388.05,4802.46 5388.05,4873.3 5429.75,4915 ; U10.16@5396.33,4083.15 5396.33,4136.33 v1(5435,4175) 5440,4180 5600,4180 5642.99,4137.01 U11.10@5642.99,4083.15 ; U15.10@5634.72,4802.46 v1(5634.72,4895.28) 5615,4915 5429.75,4915 ; U15.16@5934.72,4802.46 5950,4787.18 v1(5950,4725) ; U11.16@5942.99,4083.15 5949.84,4090 6030,4090 ; U7.1@6185,5710 6391.03,5503.97 U5.8@6475,5503.97 ; v1(6195,4975) 6203.48,4966.52 6203.48,4913.54 ; U4.8@6264.7,4852.32 6203.48,4913.54 ; v1(6400,4975) 6270,4975 6208.54,4913.54 6203.48,4913.54 ; R24.2@6500,4042.96 6509.3,4033.66 6509.3,3925 6497.62,3925 ; v1(6535,4990) 6652.96,4990 R26.1@6660,4997.04 R25.1@6805,4997.04 ; R22.2@6987.96,3760 v1(6805,3760) 6645,3920 6502.62,3920 6497.62,3925 ; 4352.18,4915 4590.49,4915 ; 4590.49,4915 4902.36,4915 ; 4902.36,4915 5130.31,4915 ; 5130.31,4915 5429.75,4915 ; 6030,4090 v2(6195,3925) 6497.62,3925 ; 6030,4090 v1(6030,4725) v1(6057.5,4752.5) v1(6085,4780) C15.2@6085,4913.54 C16.2@6135,4913.54 6203.48,4913.54
  Bottom Layer w10: H4.1@6775,3420 6775,3730 v1(6805,3760)
  Bottom Layer w19.68: v1(4025,4180) v1@4370.77,4180 ; v1(4370,4175) 4370,4179.23 v1@4370.77,4180 ; v1(4549.66,4175) 4549.66,4178.28 v1@4547.95,4180 ; v1(4900,4175) 4901.52,4176.52 v1@4901.52,4180 ; v1(5435,4175) v1@5435,4180 ; v1(5634.72,4895.28) 5669.44,4930 5955,4930 6085,4800 v1(6085,4780) ; v1(5950,4725) v1(6030,4725) ; v2(6195,3925) 5690,3925 v1@5435,4180 ; v1(6195,4975) 6195,5220 6045,5370 6045,5570 U7.1@6185,5710 6270,5795 6660,5795 U6.1@6740,5715 ; v1(6400,4975) 6520,4975 v1(6535,4990) ; v1@4370.77,4180 v1@4547.95,4180 ; v1@4547.95,4180 v1@4901.52,4180 ; v1@4901.52,4180 v1(5130,4180) v1@5435,4180
pads on no net: CN1.3 CN1.4 U1.2 U1.3 U1.10 U3.14 U4.2 U4.4 U4.9 U4.10 U4.11 U4.12 U4.13 U4.14 U4.17 U12.9 USB1.A8 USB1.B8
copper on no net:
  other v3: 5620,3220 5652.5,3220 5685,3220 5620,3250 5652.5,3250 5685,3250 5620,3280 5652.5,3280 5685,3280 5685,3310

## Polygon pours and split planes (outlines as drawn)
GND on Top Layer (solid, remove dead copper, pour order 4): 3000,3000 8055,3000 8055,6175 3000,6175
GND on Bottom Layer (solid, remove dead copper, pour order 12): 3000,3000 8055,3000 8055,6175 3000,6175
$1N3436 on Top Layer (solid, remove dead copper, pour order 0): 6480,3640 6448.91,3640 6440,3665 6415,3695 6415,3835 6420,3840 6474.41,3840 6474.41,3750.59 6475,3750 6475,3685.69 6480,3680
$1N3447 on Top Layer (solid, remove dead copper, pour order 2): 6560,3640 6595,3640 6625,3670 6625,3680 6635,3690 6635,3839.68 6576.55,3839.68 6576.55,3696.55 6560,3680

## Keep-outs
Board Outline Layer:
  lines w10: 3513.39,3183.11 ccw(c3631.5,3183.11) 3631.5,3065 7041.89,3065 ccw(c7041.89,3183.11) 7160,3183.11 7160,5721.67 ccw(c7041.89,5721.67) 7041.89,5839.78 3631.5,5839.78 ccw(c3631.5,5721.67) 3513.39,5721.67 3513.39,3183.11

## Silkscreen, mask and mechanical layers (free items; w line width, h text height)
Top Silkscreen Layer:
  lines w10: 3915,3870 5990,3870 5990,5315 3915,5315 ; 3915,3870 3915,5315 ; 3915,3870 7150,3870 ; 3915,3870 3915,3080 7150,3080 7150,3870 ; 3915,5315 5989.53,5315 5989.53,5830 ; 3915,5315 3915,5830 5989.53,5830 ; 5989.53,5035 7140,5035 7140,5830 5989.53,5830 ; 5989.53,5035 5989.53,5830 ; 5989.53,5035 7150,5035 7150,3870 ; 5989.53,5035 5989.53,3870 7150,3870
  text "3V3" at 6686.73,5523.11 h38.33
  text "A" at 6844.07,5522.97 h38.61
  text "B" at 6925.43,5522.97 h38.61
  text "GND" at 7000.12,5523.11 h38.33
  text "3V3" at 6131.73,5518.11 h38.33
  text "A" at 6289.07,5517.97 h38.61
  text "B" at 6370.43,5517.97 h38.61
  text "GND" at 6445.12,5518.11 h38.33
  text "OUTPUT" at 3926.17,5350.08 h135.94
  text "A" at 6785,5247.97 h38.61
  text "B" at 6270,5237.97 h38.61
  text "120" at 6956.73,5238.11 h38.33
  text "485" at 6000.16,5070.08 h135.94
  text "Solar Cell" at 3780.08,4152.48 h135.94 r270
  text "MCU" at 6000.16,3910.08 h135.94
  text "SHIFT REGISTER" at 3928.88,3905.08 h135.94
  text "GND" at 7026.73,3488.11 h38.33
  text "33" at 6737.72,3483.11 h38.33
  text "TX" at 6836.29,3483.11 h38.33
  text "RX" at 6943.41,3483.11 h38.33
  text "+" at 3775,3356.36 h78.45
  text "DONE" at 6055.24,3287.34 h66.9
  text "CHAG" at 6055.24,3192.34 h66.9
  text "PD" at 5159.82,3120.08 h135.94
  text "PMIC" at 3925.49,3115.08 h135.94
  text "BAT" at 6665.9,3115.08 h135.94
  text "+" at 6103.25,3106.36 h78.45

## Text inside footprints (layer, text, board x,y; h text height)
U4: Top Silkscreen Layer "WIFI" at 6415.47,4523.63 h51.92